# EAGLE board TMR01 (EAGLE 9.2.0)
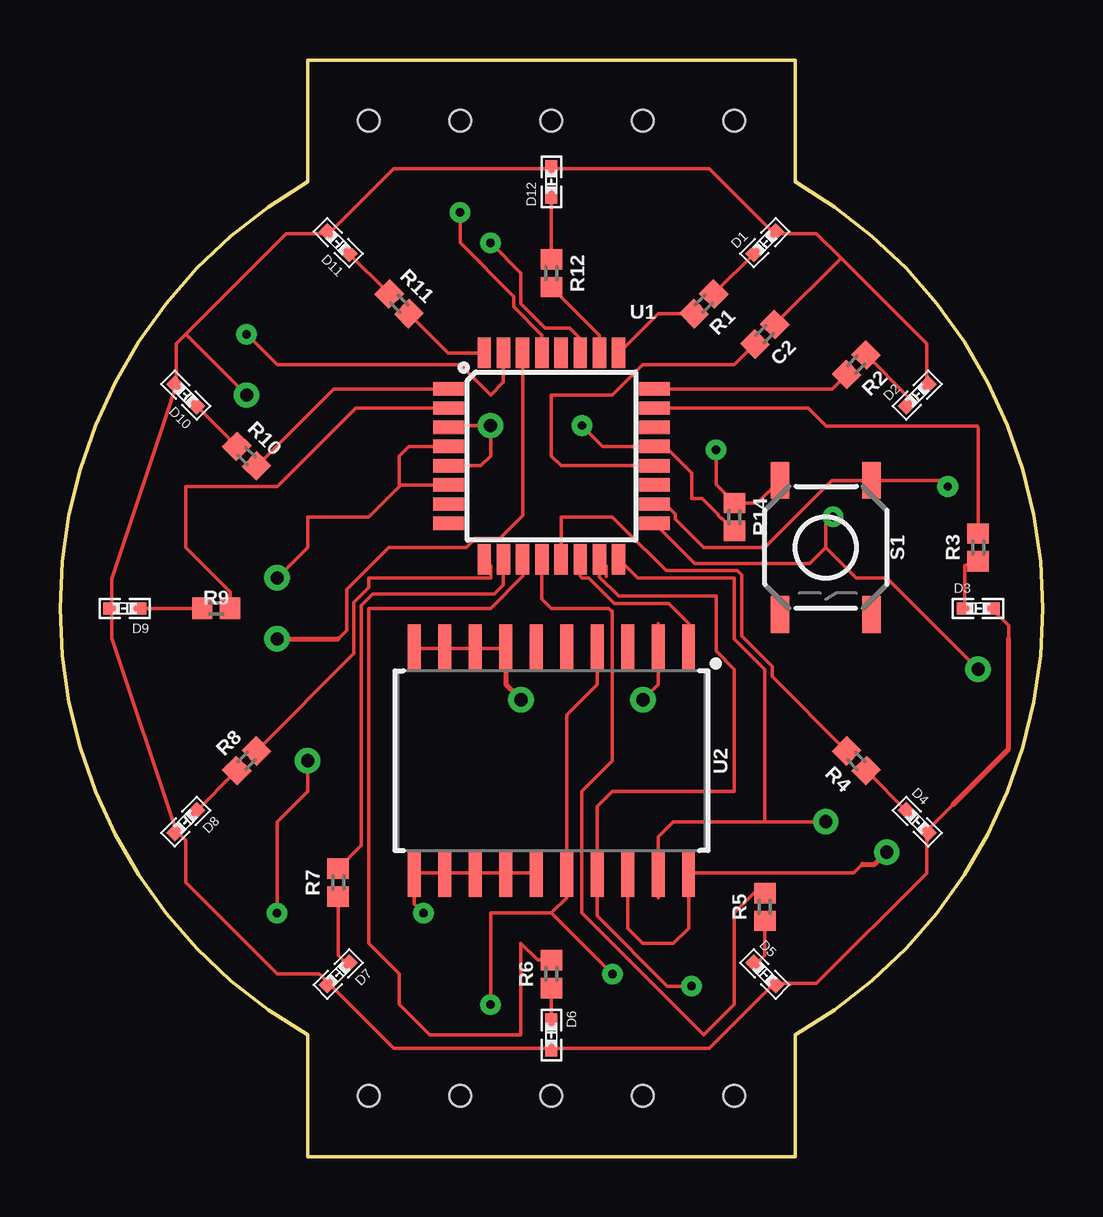
[diagram p0: board, top side]
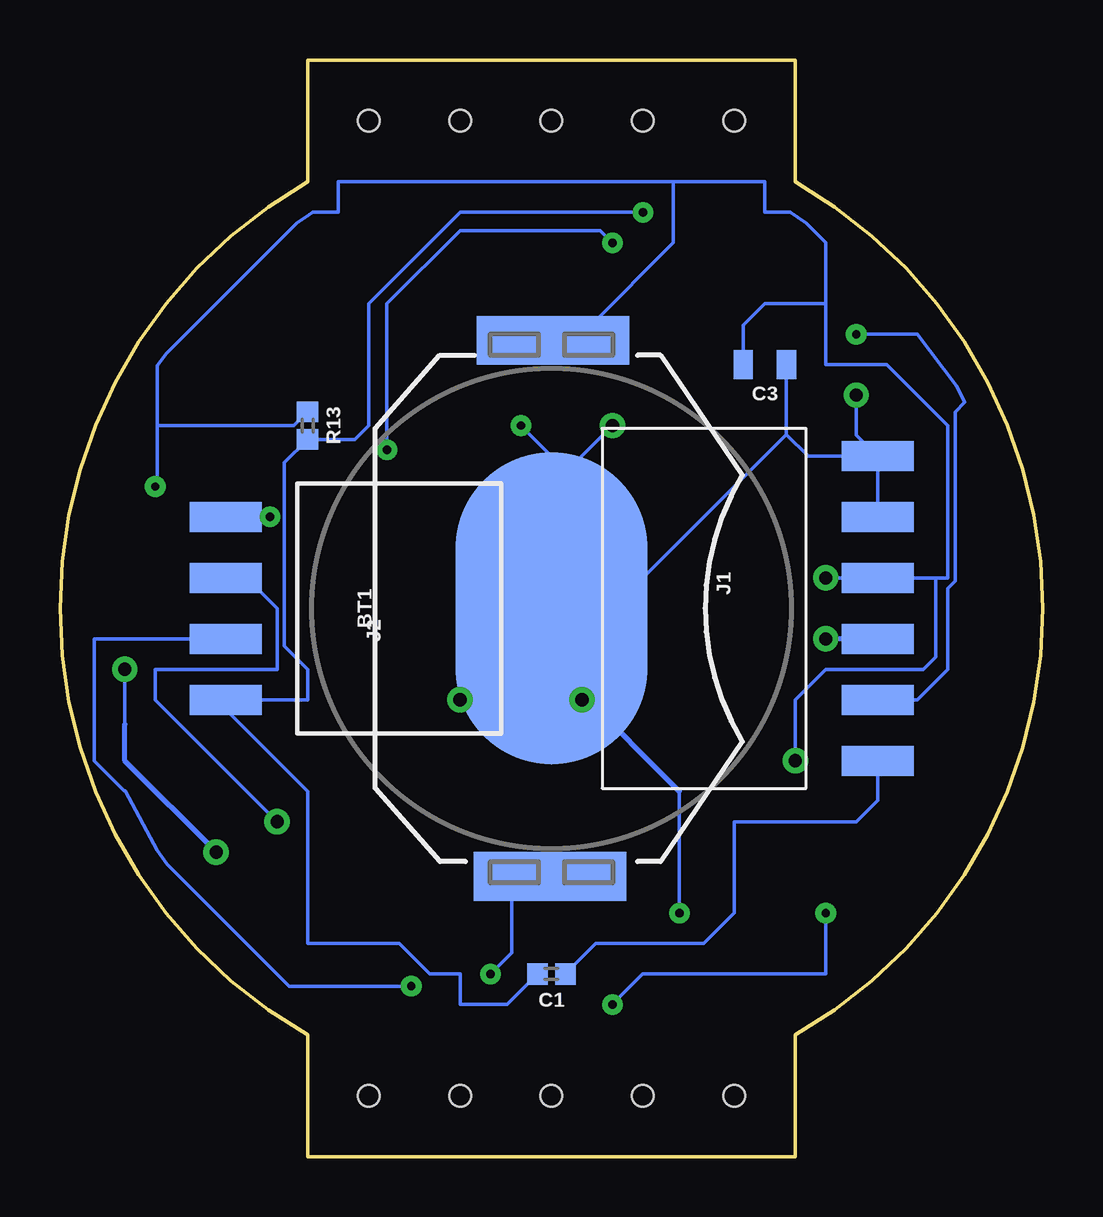
[diagram p1: board, bottom side, seen from below]

Size 40.96 x 45.72 mm. Coordinates in mm from the lower left corner, seen from the top.
Outline: 30.64,45.72 30.64,40.64 arc-121 30.64,5.08 30.64,0 10.32,0 10.32,5.08 arc-121 10.32,40.64 10.32,45.72 30.64,45.72
Copper layers (1*16): Top 0.035mm / dielectric 1.5mm / Bottom 0.035mm
Design rules "SparkFun": minimum track width 8mil, minimum drill 20mil, track to track 8mil, track to pad 8mil, pad to pad 8mil, via to via 8mil, smd to smd 8mil, copper to edge 8mil, drill to drill 8mil, minimum pad ring 12mil, minimum via ring 10mil, stop-mask expansion 4mil, vias tented up to drill 20mil, thermal gap 10mil
Holes 0.9 mm at 12.86,2.54 16.67,2.54 20.48,2.54 24.29,2.54 28.1,2.54 12.86,43.18 16.67,43.18 20.48,43.18 24.29,43.18 28.1,43.18

## Footprints (pad centres in the part's own frame; a part is rotated, then mirrored left to right if it is on the bottom)
BATTCON_20MM_4LEGS = smd 13 x 8: NEGATIVE 0,0 | smd 2.032 x 3.175: POSITIVE@1 -11.176,1.651; POSITIVE@2 -11.176,-1.524; POSITIVE@3 11.176,1.524; POSITIVE@4 11.176,-1.651
0402 = smd 0.85 x 0.9: 1 -0.58,0; 2 0.58,0
0805 = smd 0.8 x 1.2: 1 -0.9,0; 2 0.9,0
0402.LED = smd 0.7 x 0.5: P$1 -0.55,0; P$2 0.55,0
1X06-SMD-FEMALE = smd 1.25 x 3: 1 6.35,3.425; 2 3.81,3.425; 3 1.27,3.425; 4 -1.27,3.425; 5 -3.81,3.425; 6 -6.35,3.425
1X04_SMD_RA_FEMALE = smd 1.25 x 3: 1 -3.81,7.225; 2 -1.27,7.225; 3 1.27,7.225; 4 3.81,7.225
TACTILE_SWITCH_SMD_5.2MM = smd 1.524 x 0.762: 1 -2.794,1.905; 2 2.794,1.905; 3 -2.794,-1.905; 4 2.794,-1.905
TQFP32-08 = smd 1.27 x 0.559: 1 -4.293,2.8; 2 -4.293,2; 3 -4.293,1.2; 4 -4.293,0.4; 5 -4.293,-0.4; 6 -4.293,-1.2; 7 -4.293,-2; 8 -4.293,-2.8; 17 4.293,-2.8; 18 4.293,-2; 19 4.293,-1.2; 20 4.293,-0.4; 21 4.293,0.4; 22 4.293,1.2; 23 4.293,2; 24 4.293,2.8 | smd 0.559 x 1.27: 9 -2.8,-4.293; 10 -2,-4.293; 11 -1.2,-4.293; 12 -0.4,-4.293; 13 0.4,-4.293; 14 1.2,-4.293; 15 2,-4.293; 16 2.8,-4.293; 25 2.8,4.293; 26 2,4.293; 27 1.2,4.293; 28 0.4,4.293; 29 -0.4,4.293; 30 -1.2,4.293; 31 -2,4.293; 32 -2.8,4.293
SO20-0.3 = smd 0.53 x 1.98: 1 -5.715,-4.685; 2 -4.445,-4.685; 3 -3.175,-4.685; 4 -1.905,-4.685; 5 -0.635,-4.685; 6 0.635,-4.685; 7 1.905,-4.685; 8 3.175,-4.685; 9 4.445,-4.685; 10 5.715,-4.685; 11 5.715,4.685; 12 4.445,4.685; 13 3.175,4.685; 14 1.905,4.685; 15 0.635,4.685; 16 -0.635,4.685; 17 -1.905,4.685; 18 -3.175,4.685; 19 -4.445,4.685; 20 -5.715,4.685

## Placement (x,y rotation side)
BT1  [BATTCON_20MM_4LEGS]  20.48,22.86 90 bottom
C1  0.1uF  [0402]  20.48,7.62 180 bottom
C2  0.1uF  [0402]  29.37,34.29 225 top
C3  10uF  [0805]  11.59,33.02 180 bottom
D1  [0402.LED]  29.37,38.1 45 top
D2  [0402.LED]  35.72,31.75 45 top
D3  [0402.LED]  38.26,22.86 0 top
D4  [0402.LED]  35.72,13.97 315 top
D5  [0402.LED]  29.37,7.62 315 top
D6  [0402.LED]  20.48,5.08 270 top
D7  [0402.LED]  11.59,7.62 225 top
D8  [0402.LED]  5.24,13.97 225 top
D9  [0402.LED]  2.7,22.86 180 top
D10  [0402.LED]  5.24,31.75 135 top
D11  [0402.LED]  11.59,38.1 135 top
D12  [0402.LED]  20.48,40.64 90 top
FRAME1  FRAME-LETTER  [CREATIVE_COMMONS]  2.7,-7.62 0 top  (outside the outline)
J1  [1X06-SMD-FEMALE]  10.32,22.86 270 bottom
J2  [1X04_SMD_RA_FEMALE]  26.83,22.86 90 bottom
R1  200  [0402]  26.83,35.56 225 top
R2  200  [0402]  33.18,33.02 225 top
R3  200  [0402]  38.26,25.4 90 top
R4  200  [0402]  33.18,16.51 135 top
R5  200  [0402]  29.37,10.41 90 top
R6  200  [0402]  20.48,7.62 90 top
R7  200  [0402]  11.59,11.43 90 top
R8  200  [0402]  7.78,16.51 45 top
R9  200  [0402]  6.51,22.86 0 top
R10  200  [0402]  7.78,29.21 315 top
R11  200  [0402]  14.13,35.56 315 top
R12  200  [0402]  20.48,36.83 270 top
R13  10k  [0402]  30.64,30.48 270 bottom
R14  10k  [0402]  28.1,26.67 270 top
S1  MOMENTARY-SWITCH-SPST-SMD-5.2MM  [TACTILE_SWITCH_SMD_5.2MM]  31.91,25.4 270 top
U1  ATMEGA328P_TQFP  [TQFP32-08]  20.48,29.21 0 top
U2  DS3234  [SO20-0.3]  20.48,16.51 180 top

## Library data of the parts
BT1 = SparkFun-Batteries; PROD_ID: BATT-10373; SF_SKU: PRT-11892
C1 C2 = SparkFun-Capacitors; PROD_ID: CAP-12416
C3 = SparkFun-Capacitors; PROD_ID: CAP-11330
D1-D12 = standardparts
FRAME1 = SparkFun-Aesthetics
J1 = SparkFun-Connectors; PROD_ID: CONN-09668
J2 = SparkFun-Connectors; PROD_ID: CONN-12382
R1-R14 = SparkFun-Resistors
S1 = SparkFun-Switches; PROD_ID: SWCH-08247; SF_SKU: COM-08720
U1 = SparkFun-IC-Microcontroller; PROD_ID: IC-09069
U2 = SparkFun-Clocks; PROD_ID: IC-10016; SF_ID: COM-10079

## Nets
D1: R11.2 U1.32
D2: R10.2 U1.1
D3: R9.2 U1.2
D4: R8.2 U1.9
D5: R7.2 U1.10
D6: R6.2 U1.11
D7: R5.2 U1.12
D8: R4.2 U1.13
D9: R3.2 U1.23
D10: R2.2 U1.24
D11: R1.2 U1.25
D12: R12.2 U1.26
DTR: C1.1 J1.1
GND: BT1.NEGATIVE C2.1 C3.1 D1.P$2 D2.P$2 D3.P$2 D4.P$2 D5.P$2 D6.P$2 D7.P$2 D8.P$2 D9.P$2 D10.P$2 D11.P$2 D12.P$2 J1.5 J1.6 R14.2 U1.3 U1.5 U1.21 U2.2 U2.7 U2.8 U2.9 U2.10 U2.11 U2.12 U2.13 U2.14 U2.15
MISO: J2.3 U1.16 U2.19
MOSI: J2.2 U1.15 U2.17
N$1: D8.P$1 R8.1
N$2: D7.P$1 R7.1
N$3: D6.P$1 R6.1
N$4: D5.P$1 R5.1
N$5: D4.P$1 R4.1
N$6: D3.P$1 R3.1
N$7: D2.P$1 R2.1
N$8: D1.P$1 R1.1
N$17: C2.2 U1.20
N$18: D9.P$1 R9.1
N$20: D10.P$1 R10.1
N$22: D11.P$1 R11.1
N$24: D12.P$1 R12.1
PUSH: R14.1 S1.3 U1.27
RST: C1.2 J2.1 R13.2 U1.29
RX: J1.3 U1.30
SCK: J2.4 U1.17 U2.18 U2.20
SS: U1.14 U2.1
TX: J1.2 U1.31
VCC: BT1.POSITIVE@1 BT1.POSITIVE@2 BT1.POSITIVE@3 BT1.POSITIVE@4 C3.2 J1.4 R13.1 S1.1 U1.4 U1.6 U1.18 U2.4 U2.16

## Tracks (layer width: path | path; a pad name or v marks a point on that pad's centre or on a via)
D1
  Top 0.152: R11.2 16.19,33.5 U1.32
D2
  Top 0.152: R10.2 11.4,32.01 U1.1
D3
  Top 0.152: R9.2 7.09,23.55 5.24,25.4 5.24,27.94 9.05,27.94 12.32,31.21 U1.2
D4
  Top 0.152: R8.2 12.25,20.98 12.25,22.86 12.25,23.11 12.86,23.72 12.86,24.13 17.94,24.13 17.94,24.66 U1.9
D5
  Top 0.152: R7.2 12.55,12.97 12.55,22.99 13.02,23.46 18.1,23.46 18.48,23.83 U1.10
D6
  Top 0.152: U1.11 19.28,24.2 17.94,22.86 12.86,22.86 12.86,8.89 14.13,7.62 14.13,6.35 15.4,5.08 19.21,5.08 19.21,8.89 19.9,8.2 R6.2
D7
  Top 0.152: U1.12 20.08,23.26 20.48,22.86 22.87,22.86 22.97,22.76 23.02,22.76 23.02,16.51 21.75,15.24 21.75,10.16 26.83,5.08 28.1,6.35 28.1,10.16 28.93,10.99 R5.2
D8
  Top 0.152: 23.02,26.67 | R4.2 29.67,20.02 29.67,20.45 28.4,21.72 28.4,24.26 28.22,24.44 25.25,24.44 24.47,25.22 24.29,25.4 23.02,26.67 | U1.13 20.88,26.67 23.02,26.67
D9
  Top 0.152: U1.23 31.18,31.21 31.92,30.46 38.23,30.46 38.26,30.37 R3.2
D10
  Top 0.152: R2.2 32.17,32.01 U1.24
D11
  Top 0.152: R1.2 24.93,35.15 U1.25
D12
  Top 0.152: R12.2 22.48,34.25 U1.26
DTR
  Bottom 0.152: C1.1 18.92,8.6 18.63,8.89 14.13,8.89 12.86,10.16 12.86,13.97 7.78,13.97 6.89,14.85 J1.1
GND  (via drill 0.35, 0.55)
  Top 0.152: U2.15 U2.14 U2.13 U2.12 U2.11 14.76,10.54 v15.14,10.16 | D2.P$2 36.11,33.9 32.54,37.47 | 32.54,37.47 31.52,38.49 D1.P$2 27.06,41.19 D12.P$2 13.9,41.19 D11.P$2 9.44,38.49 5.24,34.29 | 37.21,14.69 D4.P$2 36.11,11.82 31.52,7.23 D5.P$2 27.06,4.53 D6.P$2 13.9,4.53 D7.P$2 10.81,7.62 9.05,7.62 5.24,11.43 5.24,13.19 D8.P$2 2.15,21.63 D9.P$2 2.15,24.09 D10.P$2 4.85,33.9 5.24,34.29 | 39.53,21.59 39.53,22.14 D3.P$2 | U2.10 U2.9 U2.8 U2.7 | 24.92,22.23 U2.2 24.92,19.69 v24.29,19.05 | v7.78,31.75 5.24,34.29 | C2.1 32.54,37.47 | R14.2 27.59,26.6 27.55,26.6 27.42,26.73 27.42,26.77 26.76,27.43 26.32,27.43 26.32,28.5 25.21,29.61 U1.21 22.62,29.61 v21.75,30.48 | U1.5 17.54,28.81 17.94,29.21 v17.94,30.48 16.26,30.48 U1.3
  Top 0.203: 37.21,14.69 39.53,17 39.53,21.59 | U2.7 18.57,19.69 v19.21,19.05
  Bottom 0.152: C3.1 10.69,30.11 | 10.69,30.11 17.94,22.86 BT1.NEGATIVE 20.48,27.94 | J1.5 J1.6 | J1.6 9.79,29.21 10.69,30.11 | J1.6 7.78,30.09 v7.78,31.75 | v15.14,10.16 15.14,15.24 | v17.94,30.48 20.48,27.94 | v21.75,30.48 20.48,29.21 20.48,27.94 | v24.29,19.05 21.49,19.05 20.35,20.19
  Bottom 0.203: 20.35,20.19 20.48,20.32 BT1.NEGATIVE 20.48,21.59 19.21,20.32 19.21,19.3 | 15.14,15.24 19.21,19.3 | v19.21,19.05 19.21,19.3
MISO  (via drill 0.55)
  Top 0.152: 24.92,10.79 U2.19 24.92,13.33 25.56,13.97 29.37,13.97 | 29.37,13.97 29.37,20.32 28.1,21.59 28.1,24.13 24.07,24.13 U1.16 | 29.37,13.97 v31.91,13.97
  Bottom 0.152: J2.3 33.18,24.13 31.91,22.86 31.91,20.32 36.99,20.32 36.99,19.05 v31.91,13.97
MOSI  (via drill 0.35)
  Top 0.152: 22.77,24.19 22.77,24.62 U1.15 22.48,24.16 23.27,23.37 27.34,23.37 27.34,21.08 28.1,20.32 28.1,15.24 23.02,15.24 22.38,14.6 U2.17 22.38,10.03 25.3,7.11 v26.32,7.11
  Bottom 0.152: v26.32,7.11 31.4,7.11 36.48,12.19 36.91,12.76 38.23,15.26 38.27,15.26 39.53,16.51 39.53,21.59 J2.2
N$1
  Top 0.152: D8.P$1 R8.1
N$2
  Top 0.152: D7.P$1 11.59,8.4 R7.1
N$3
  Top 0.152: D6.P$1 R6.1
N$4
  Top 0.152: D5.P$1 29.37,8.4 R5.1
N$5
  Top 0.152: D4.P$1 R4.1
N$6
  Top 0.152: R3.1 37.71,24.65 D3.P$1
N$7
  Top 0.152: D2.P$1 35.33,31.69 R2.1
N$8
  Top 0.152: D1.P$1 R1.1
N$17
  Top 0.152: C2.2 28.1,33.02 24.29,33.02 23.02,31.75 20.48,31.75 20.48,29.21 20.88,28.81 U1.20
N$18
  Top 0.152: D9.P$1 R9.1
N$20
  Top 0.152: D10.P$1 R10.1
N$22
  Top 0.152: D11.P$1 R11.1
N$24
  Top 0.152: D12.P$1 R12.1
PUSH  (via drill 0.35)
  Top 0.152: v17.94,38.1 19.21,36.83 19.21,35.56 20.22,34.54 21.24,34.54 21.68,34.11 U1.27 21.75,33.57 | 29.75,27.94 S1.3 29.06,27.25 R14.1 27.34,28.01 v27.34,29.46
  Bottom 0.152: v27.34,29.46 27.34,35.56 24.29,38.61 18.45,38.61 v17.94,38.1
RST  (via drill 0.35)
  Top 0.152: v16.67,39.37 16.67,38.1 18.9,35.87 18.9,35.43 20.08,34.26 U1.29
  Bottom 0.152: v16.67,39.37 24.29,39.37 28.1,35.56 28.1,30.48 28.68,29.9 R13.2 31.6,28.94 31.6,21.28 30.64,20.32 30.64,19.05 J2.1 34.05,18.66 30.64,15.24 30.64,8.89 26.83,8.89 25.56,7.62 24.29,7.62 24.29,6.35 22.33,6.35 C1.2
RX  (via drill 0.55)
  Top 0.152: U1.30 19.28,26.74 18.32,25.78 17.3,25.78 16.92,25.4 13.7,25.4 11.94,23.65 11.94,21.95 11.59,21.59
  Top 0.203: v9.05,21.59 11.59,21.59
  Bottom 0.203: J1.3 v9.05,21.59
SCK  (via drill 0.35, 0.55)
  Top 0.152: U2.18 23.65,9.53 24.29,8.89 25.56,8.89 26.19,9.53 U2.20 33.07,11.83 33.43,12.19 | U1.17 26.44,24.74 31.25,24.74 31.91,25.4 | v38.26,20.32 34.45,24.13 33.18,24.13 31.91,25.4 | 31.91,25.4 31.91,26.37 v32.21,26.67
  Top 0.203: 33.43,12.19 33.94,12.19 v34.45,12.7
  Bottom 0.152: 38.26,18.03 v38.26,20.32 | v32.21,26.67 J2.4
  Bottom 0.203: v34.45,12.7 38.26,16.51 38.26,18.03
SS
  Top 0.152: U2.1 26.19,22.23 25.36,23.06 23.1,23.06 22.03,24.13 21.75,24.13 21.68,24.2 U1.14
TX  (via drill 0.35)
  Top 0.152: U1.31 18.48,32.29 17.94,31.75 16.67,33.02 9.05,33.02 v7.78,34.29
  Bottom 0.152: v7.78,34.29 5.24,34.29 3.61,32.14 3.25,31.46 3.66,31.05 3.66,24 3.97,23.7 3.97,20.32 5.24,19.05 J1.2
VCC  (via drill 0.35, 0.55)
  Top 0.152: v36.99,27.94 36.73,28.19 S1.1 32.16,28.19 29.37,25.4 26.83,25.4 25.63,26.59 25.63,26.78 25.21,27.21 U1.18 | U1.6 14.2,28.01 14.13,27.94 | 14.13,27.94 14.13,29.21 14.53,29.61 U1.4 | 14.13,27.94 12.86,26.67 10.32,26.67 10.32,25.4 v9.05,24.13 | U2.4 22.38,19.69 21.11,18.41 U2.16 21.11,10.79 20.48,10.16 | 20.48,10.16 17.94,10.16 v17.94,6.35 | v9.05,10.16 9.05,13.97 10.32,15.24 v10.32,16.51 | v23.02,7.62 20.48,10.16
  Bottom 0.152: 4.48,24.13 J1.4 v9.05,24.13 | 4.48,24.13 3.97,24.13 3.97,30.48 6.51,33.02 9.05,33.02 9.05,35.56 | C3.2 12.49,34.66 11.59,35.56 9.05,35.56 | 9.05,35.56 9.05,38.1 9.87,38.92 10.52,39.37 11.59,39.37 11.59,40.64 15.4,40.64 | 15.4,40.64 29.37,40.64 29.37,39.37 30.43,39.37 30.57,39.27 31.09,38.92 36.5,33.51 36.9,32.98 36.9,30.48 | v36.99,27.94 36.9,28.02 36.9,30.48 | BT1.POSITIVE@3 BT1.POSITIVE@4 18.83,34.67 15.4,38.1 15.4,40.64 | R13.1 31.22,30.48 36.9,30.48 | v23.02,7.62 22.13,8.51 BT1.POSITIVE@1 BT1.POSITIVE@2 | v17.94,6.35 16.67,7.62 9.05,7.62 v9.05,10.16 | v10.32,16.51 10.32,19.05 9.05,20.32 4.98,20.32 4.48,20.83 4.48,24.13